# Altium PCB STN1170_RN-42_rev2.PcbDoc
Units mil, origin at the board's own origin, x right, y up, seen from the top; angles counter-clockwise.
Board outline 681.1 x 1476.38 mil, 2 copper layers (Top Layer, Bottom Layer), stack 63.4 mil thick; 40 components, 39 nets, 174 pads, 68 vias.
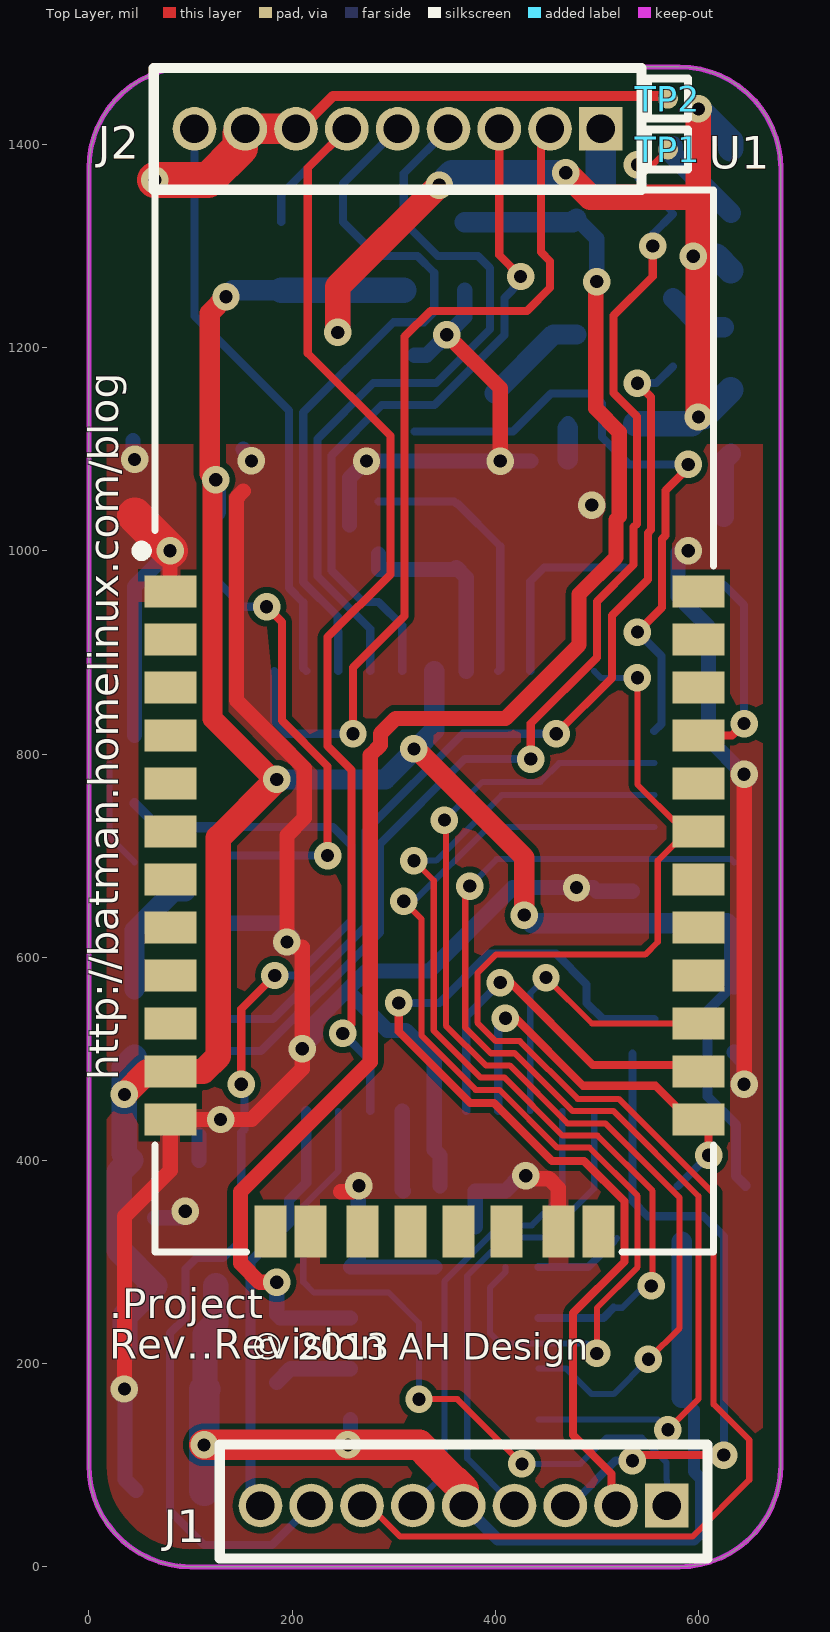
[diagram p0: Top Layer view]
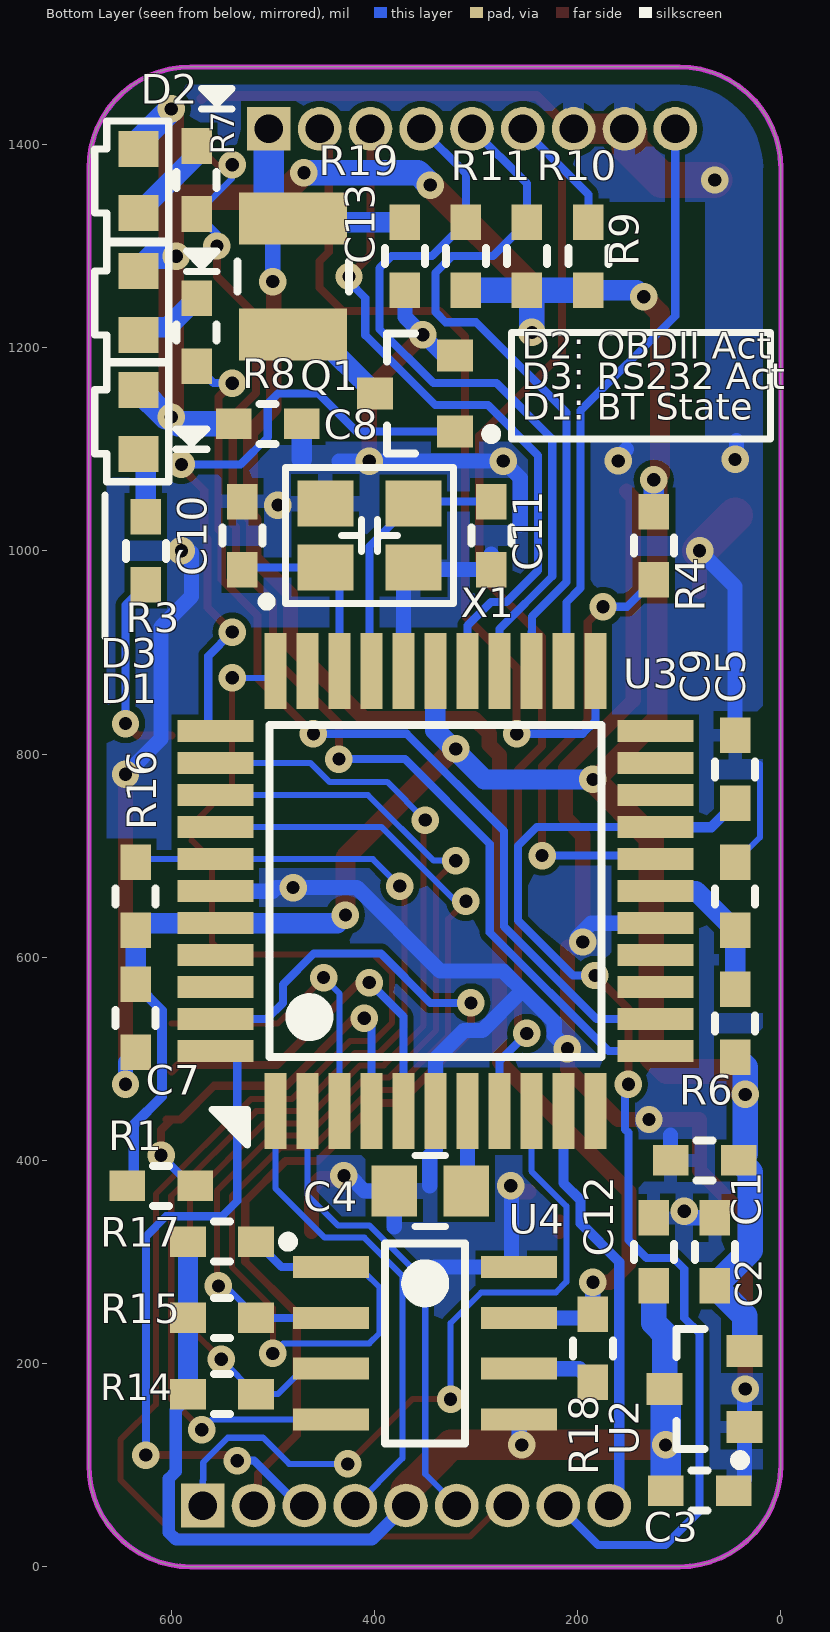
[diagram p1: Bottom Layer view, seen from below]

## Layer stack, top to bottom
Top Layer: signal copper 0.7
Dielectric: core 62, FR-408, Dk 3.81
Bottom Layer: signal copper 0.7

## Board outline
0,100 ccw(c100,100) 100,0 581.1,0 ccw(c581.1,100) 681.1,100 681.1,1376.38 ccw(c581.1,1376.38) 581.1,1476.38 100,1476.38 ccw(c100,1376.38) 0,1376.38

## Design rules (kind name [scope] priority, off if disabled: settings)
AcuteAngle [All] p1: minimum=6.00000000000000E+0001 checktracksonly=FALSE
Clearance Clearance_outline [OnLayer('Top Layer') or OnLayer('Bottom Layer') or IsVia vs OnLayer('Keep-Out Layer')] p1: gap=15
Clearance [All] p2: gap=6
ComponentClearance [All] p1: gap=6 collisioncheckmode=3 verticalgap=6 showdistances=FALSE
ComponentOrientations [All] p1: allowedrotations=27
DiffPairsRouting [All] p1: maxlimit=10 minlimit=5 mostfreqgap=7 maxuncoupledlength=250
FabricationTestPointUsage TestPointUsage [All] p1: valid=2 allowmultiple=TRUE
FabricationTestpoint Testpoint [All] p1: side=3 testpointundercomponent=FALSE minsize=40 maxsize=100 preferedsize=60 minholesize=0 maxholesize=40 preferedholesize=32 testpointgrid=1 allowsidetop=TRUE allowsidebottom=TRUE usegrid=TRUE gridtolerance=0.01
Height [All] p1: minheight=0 maxheight=1500 prefheight=500
HoleSize [All] p1: absolutevalues=TRUE maxlimit=500 minlimit=13 maxpercent=80.000 minpercent=20.000
MinimumAnnularRing [All] p1: minimumring=7
MinimumSolderMaskSliver MinimumSolderMaskSliver_J1_J2_U3 [InComponent('J1') or InComponent('J2') or InComponent('U3') or InComponent('U1')] p1: minsoldermaskwidth=4
MinimumSolderMaskSliver [All] p2: minsoldermaskwidth=4
PermittedLayers [All] p1: toplayerpermitted=TRUE bottomlayerpermitted=TRUE
PlaneConnect PlaneConnect_Vias [IsVia] p1: planeconnectstyle=Direct reliefexpansion=20 reliefentries=4 reliefconductorwidth=10 reliefairgap=10
PlaneConnect [All] p2: planeconnectstyle=Relief reliefexpansion=20 reliefentries=4 reliefconductorwidth=15 reliefairgap=15
PolygonConnect PolygonConnect_X1 [InComponent('X1')] p1: connectstyle=Relief reliefconductorwidth=15 reliefentries=4 polygonreliefangle="90 Angle"
PolygonConnect PolygonConnect_J1_J2 [InComponent('J1') or InComponent('J2')] p2: connectstyle=Relief reliefconductorwidth=20 reliefentries=4 polygonreliefangle="90 Angle"
PolygonConnect PolygonConnect_U1 [InComponent('U1')] p3: connectstyle=Relief reliefconductorwidth=20 reliefentries=4 polygonreliefangle="90 Angle"
PolygonConnect PolygonConnect_TQFP [HasFootprint( 'TQFP80P1200X1200X120-44N')] p4: connectstyle=Relief reliefconductorwidth=15 reliefentries=4 polygonreliefangle="90 Angle"
PolygonConnect PolygonConnect_SOIC [HasFootprint( 'SOIC8N') or HasFootprint('SOIC127P600X172-8L')] p5: connectstyle=Relief reliefconductorwidth=15 reliefentries=4 polygonreliefangle="90 Angle"
PolygonConnect PolygonConnect_1206 [HasFootprint( 'CC1206') or HasFootprint( 'R1206')] p6: connectstyle=Relief reliefconductorwidth=20 reliefentries=4 polygonreliefangle="90 Angle"
PolygonConnect PolygonConnect_0805 [HasFootprint( 'CC0805') or HasFootprint( 'R0805')] p7: connectstyle=Relief reliefconductorwidth=15 reliefentries=4 polygonreliefangle="90 Angle"
PolygonConnect PolygonConnect_SOD323 [HasFootprint( 'SOD323_1_2')] p8: connectstyle=Relief reliefconductorwidth=15 reliefentries=4 polygonreliefangle="90 Angle"
PolygonConnect PolygonConnect_0603 [HasFootprint( 'CC0603') or HasFootprint( 'R0603')] p9: connectstyle=Relief reliefconductorwidth=13 reliefentries=4 polygonreliefangle="90 Angle"
PolygonConnect PolygonConnect_TSSOP_0.65P [HasFootprint( 'TSSOP14') or HasFootprint( 'SOT-23-8L')] p10: connectstyle=Relief reliefconductorwidth=12 reliefentries=4 polygonreliefangle="90 Angle"
PolygonConnect PolygonConnect_SOT23 [HasFootprint( 'SOT23')] p11: connectstyle=Relief reliefconductorwidth=12 reliefentries=4 polygonreliefangle="90 Angle"
PolygonConnect PolygonConnect_SOT23-5L [HasFootprint( 'SOT-23-5')] p12: connectstyle=Relief reliefconductorwidth=15 reliefentries=4 polygonreliefangle="90 Angle"
PolygonConnect [All] p13: connectstyle=Direct reliefconductorwidth=10 reliefentries=4 polygonreliefangle="90 Angle"
RoomDefinition "U_STN1170_RN-42 SW_CAN" [InComponentClass('U_STN1170_RN-42 SW_CAN')] p1: confinementstyle=ConfineIn formatcopy=TRUE lockcomponents=FALSE outline 90,105 670,105 670,1365 90,1365
RoomDefinition "U_STN1170_RN-42 CPU" [InComponentClass('U_STN1170_RN-42 CPU')] p2: confinementstyle=ConfineIn formatcopy=TRUE lockcomponents=FALSE outline 10,135 685,135 685,1475 10,1475
RoomDefinition "STN1170_RN-42 Toplevel Rev2" [InComponentClass('STN1170_RN-42 Toplevel Rev2')] p3: confinementstyle=ConfineIn formatcopy=TRUE lockcomponents=FALSE outline -10,-15 685,-15 685,1490 -10,1490
RoutingTopology RoutingTopology_Bottom [OnLayer('Bottom Layer')] p1: topology=Vertical
RoutingTopology RoutingTopology_Mid4 [OnLayer('Mid-Layer 4')] p2: topology=Horizontal
RoutingTopology RoutingTopology_Mid3 [OnLayer('Mid-Layer 3')] p3: topology=Vertical
RoutingTopology RoutingTopology_Mid2 [OnLayer('Mid-Layer 2')] p4: topology=Horizontal
RoutingTopology RoutingTopology_Mid1 [OnLayer('Mid-Layer 1')] p5: topology=Vertical
RoutingTopology RoutingTopology_Top [OnLayer('Top Layer')] p6: topology=Horizontal
RoutingVias [All] p1: holewidth=20 width=36 viastyle="Through Hole" minholewidth=13 minwidth=27 maxholewidth=100 maxwidth=300
SilkToSilkClearance [IsText] p1: silktosilkclearance=0
SilkscreenOverComponentPads [IsText] p1: minsilkscreentomaskgap=3
SolderMaskExpansion SolderMaskExpansion_U3_U1 [InComponent('U3') or InComponent('U1')] p1: expansion=2
SolderMaskExpansion SolderMaskExpansion_J1_J2 [InComponent('J1') or InComponent('J2')] p2: expansion=1
SolderMaskExpansion SolderMaskExpansion_13mil_via [IsVia and AsMils(HoleSize = 13)] p3: expansion=-13.5
SolderMaskExpansion [All] p4: expansion=3
ViasUnderSMD [All] p1: allowed=FALSE
Width [All] p1: maxlimit=150 minlimit=6 preferedwidth=10 minimp=50.000000 maximp=50.000000 favimp=50.000000
17 further rules are at their usual default settings.

## Classes and differential pairs
component class "STN1170_RN-42 Toplevel Rev2": C1 C2 C3 D1 J1 J2 R1 R3 U1 U2
component class "U_STN1170_RN-42 CPU": C4 C5 C7 C8 C9 C10 C11 D2 D3 R4 R6 R7 R8 R9 R10 R11 R14 R15 TP1 TP2 U3 X1
component class "U_STN1170_RN-42 SW_CAN": C12 C13 Q1 R16 R17 R18 R19 U4

## Components (designator, comment, footprint, x,y, rotation, side; value= is the part's Value field where it differs from the comment)
C1 "0.1uF" CC0603 75,400 r0 bottom locked
C2 "1uF" CC0603 65,310 r270 bottom locked
C3 "0.1uF" CC0603 80,75 r180 bottom locked
C4 "10uF" CC0805 345,370 r0 bottom locked
C5 "0.1uF" CC0603 45,785 r270 bottom locked
C7 "0.1uF" CC0603 635,540 r90 bottom locked
C8 "0.1uF" CC0603 505,1125 r0 bottom locked
C9 "0.1uF" CC0603 45,660 r270 bottom locked
C10 "22pF" CC0603 530,1015 r270 bottom locked
C11 "22pF" CC0603 285,1015 r90 bottom locked
C12 "0.1uF" CC0603 125,310 r90 bottom locked
C13 "150pF" CC0603 370,1290 r90 bottom locked
D1 "APA1606SECK" KINGBRIGHT_APA1606SECK 632,1127 r270 bottom locked
D2 "APA1606SECK" KINGBRIGHT_APA1606SECK 632,1364.08 r270 bottom locked
D3 "APA1606SECK" KINGBRIGHT_APA1606SECK 632,1244.08 r270 bottom locked
J1 "TMS-109-02-L-S" Samtec_TMS-109-02-L-S 368.94,60.32 r180 top locked
J2 "TMS-109-02-L-S" Samtec_TMS-109-02-L-S 303.94,1415.31 r180 top locked
Q1 "2N7002K-7" SOT23 360,1155 r0 bottom locked
R1 "1K" R0603 610,375 r0 bottom
R3 "1K" R0603 625,1000 r270 bottom locked
R4 "10K" R0603 125,1005 r270 bottom locked
R6 "10" R0603 45,535 r90 bottom locked
R7 "1K" R0603 575,1365 r90 bottom locked
R8 "1K" R0603 575,1215 r90 bottom locked
R9 "10K" R0603 189.42,1290 r90 bottom locked
R10 "10K" R0603 250,1290 r90 bottom locked
R11 "10K" R0603 310,1290 r90 bottom locked
R14 "10K" R0603 550,170 r0 bottom locked
R15 "10K" R0603 550,245 r0 bottom locked
R16 "1K" R0603 635,660 r270 bottom locked
R17 "1K" R0603 550,320 r0 bottom locked
R18 "6.49K" R0603 185,215 r90 bottom locked
R19 "120" R1210 480,1270 r90 bottom locked
TP1 "Name" TP,0.5mmx0.5mm,RND 570,1395 r90 top locked
TP2 "Name" TP,0.5mmx0.5mm,RND 570,1445 r90 top locked
U1 "RN-42" RN-42 340,645 r0 top locked
U2 "MCP1700T-3302E/TT" SOT23 75,175 r0 bottom locked
U3 "STN1170 TQFP" TQFP80P1200X1200X120-44N 340,665 r90 bottom locked
U4 "TH8056KDC-AAA-008-RE" SOIC127P600X172-8L 350,220 r180 bottom locked
X1 "TSX-3225 16.0000MF18X-AC3" "Epson_TSX-3225 16.0000MF18X-AC3" 405,1015 r180 bottom locked

## Footprints (in the part's own frame and the unit in brackets; to place one, negate y for a bottom-side part, rotate by r counter-clockwise, add the part's x,y. Pads: shape width x height; smd on the part's side, far side on the other; paste and mask are expansions set on the pad)
CC0603 [mil] "Chip Capacitor, Body 1.6x0.8mm, IPC Medium Density"
  rect 35x30 smd: 1(-33.46,0) 2(33.46,0)
  silkscreen extent -8,-20 8,20, body extent -33,-19 33,19, height 24
CC0805 [mil] "Chip Capacitor, Body 2.0x1.3mm, IPC Medium Density"
  rect 45x50 smd: 1(-35.43,0) 2(35.43,0)
  silkscreen extent -15,-35 15,35, body extent -42,-28 42,28, height 26
"Epson_TSX-3225 16.0000MF18X-AC3" [mm] "Epson TSX-3225 series footprint"
  rect 1.4x1.15 smd: 1(-1.1,-0.8) 3(1.1,0.8) GND(-1.1,0.8) GND(1.1,-0.8)
  silkscreen extent -2.67,-1.75 2.1,1.7, body extent -1.58,-1.25 1.6,1.25, height 0.6
KINGBRIGHT_APA1606SECK [mm] "Kingbright Right-Angle LED footprint (0605)"
  rect 0.9x1 smd: A(-0.8,0) C(0.8,0)
  silkscreen extent -1.5,-1.1 1.5,0.75, body extent -0.8,-0.9 0.8,0.3, height 0.6
R0603 [mil] "Chip Resistor, 2-Leads, Body 1.7x0.8mm, IPC High Density"
  rect 35x30 smd: 1(-33.46,0) 2(33.46,0)
  silkscreen extent -8,-20 8,20, body extent -33,-19 33,19, height 24
R1210 [mm] "Chip Resistor, 2-Leads, Body 3.3x2.7mm, IPC High Density"
  rect 1.3x2.7 smd: 1(-1.45,0) 2(1.45,0)
  silkscreen extent -0.38,-1.4 0.38,1.4, body extent -1.68,-1.32 1.68,1.32, height 0.71
RN-42 [mm] "Roving Networks RN-42 module footprint"
  rect 1.3x0.8 smd: 1(-6.6,8)
  rect 1.3x0.8 smd paste-0.508: 2(-6.6,6.8) 3(-6.6,5.6) 4(-6.6,4.4) 5(-6.6,3.2) 6(-6.6,2) 7(-6.6,0.8) 8(-6.6,-0.4) 9(-6.6,-1.6) 10(-6.6,-2.8) 11(-6.6,-4) 12(-6.6,-5.2) 13(6.6,-5.2) 14(6.6,-4) 15(6.6,-2.8) 16(6.6,-1.6) 17(6.6,-0.4) 18(6.6,0.8) 19(6.6,2) 20(6.6,3.2) 21(6.6,4.4) 22(6.6,5.6) 23(6.6,6.8) 24(6.6,8)
  rect 0.8x1.3 smd paste-0.508: 28(3.1,-8) 29(-3.1,-8) 30(4.1,-8) 31(1.8,-8) 32(0.6,-8) 33(-0.6,-8) 34(-1.8,-8) 35(-4.1,-8)
  Top Layer pour cut-out: 6.75,11.75 6.75,17.75 -6.75,17.75 -6.75,11.75
  Bottom Layer pour cut-out: 6.75,11.75 6.75,17.75 -6.75,17.75 -6.75,11.75
  body extent -6.96,-8.36 6.96,17.6, height 2
Samtec_TMS-109-02-L-S [mil] "CONN HEADER .050\" 9POS PCB GOLD"
  rect 43x43 hole 28: 1(-200,0)
  round 43 hole 28: 2(-150,0) 3(-100,0) 4(-50,0) 5(0,0) 6(50,0) 7(100,0) 8(150,0) 9(200,0)
  silkscreen extent -240,-60 240,52
SOIC127P600X172-8L [mm] "SOIC, 8-Leads, Body 5.0x4.0mm (max), Pitch 1.27mm, IPC High Density"
  rect 1.9x0.55 smd: 1(-2.35,1.905) 2(-2.35,0.635) 3(-2.35,-0.635) 4(-2.35,-1.905) 5(2.35,-1.905) 6(2.35,-0.635) 7(2.35,0.635) 8(2.35,1.905)
  silkscreen extent -3.56,-2.5 1,2.66, body extent -1.99,-2.49 1.99,2.49, height 1.72
SOT23 [mm] "SOT23, 3-Leads, Body 3.0x2.6mm, Pitch 0.95mm"
  rect 0.9x0.8 smd: 1(-1,0.95) 2(-1,-0.95) 3(1,0)
  silkscreen extent -2.03,-1.5 0.7,1.5, body extent -0.7,-1.52 0.7,1.52, height 1.11
TP,0.5mmx0.5mm,RND [mm] "0.5x0.5 SMT test point."
  round 0.5 smd: 1(0,0)
  silkscreen extent -0.5,-0.5 0.5,0.5
TQFP80P1200X1200X120-44N [mm] "TQFP, 44-Leads, Body 12.0x12.0mm (max), Pitch 0.80mm, IPC Medium Density"
  rect 1.9x0.55 smd: 1(-5.5,4)
  rect 1.9x0.55 smd paste-0.381: 2(-5.5,3.2) 3(-5.5,2.4) 4(-5.5,1.6) 5(-5.5,0.8) 6(-5.5,0) 7(-5.5,-0.8) 8(-5.5,-1.6) 9(-5.5,-2.4) 10(-5.5,-3.2) 11(-5.5,-4) 23(5.5,-4) 24(5.5,-3.2) 25(5.5,-2.4) 26(5.5,-1.6) 27(5.5,-0.8) 28(5.5,0) 29(5.5,0.8) 30(5.5,1.6) 31(5.5,2.4) 32(5.5,3.2) 33(5.5,4)
  rect 0.55x1.9 smd paste-0.381: 12(-4,-5.5) 13(-3.2,-5.5) 14(-2.4,-5.5) 15(-1.6,-5.5) 16(-0.8,-5.5) 17(0,-5.5) 18(0.8,-5.5) 19(1.6,-5.5) 20(2.4,-5.5) 21(3.2,-5.5) 22(4,-5.5) 34(4,5.5) 35(3.2,5.5) 36(2.4,5.5) 37(1.6,5.5) 38(0.8,5.5) 39(0,5.5) 40(-0.8,5.5) 41(-1.6,5.5) 42(-2.4,5.5) 43(-3.2,5.5) 44(-4,5.5)
  silkscreen extent -4.15,-4.15 4.15,4.15, body extent -5,-5 5,5, height 1.2

## Part data
C1 C3 C5 C7 C8 C9 C12: library part 0.1uF,50V,CC0603,X7R,+/-20%, "0.1uF 50V, in a CC0603, X7R ,+/-20%,LF"
C2: library part 1uF,6.3V,CC0603,X7R,+/-20%, "1uF 6.3V, in a CC0603, X7R ,+/-20%,LF"
C4: library part 10uF,6.3V,CC0805,X5R,+/-20%, "10uF 6.3V, in a CC0805, X5R ,+/-20%,LF"
C10 C11: library part 22pF,10V,CC0603,COG,+/-2%, "22pF 10V, in a CC0603, COG ,+/-2%,LF"
C13: library part 150pF,50V,CC0603,X7R,+/-20%, "150pF 50V, in a CC0603, X7R ,+/-20%,LF"
D1 D2 D3: library part KINGBRIGHT_APA1606SECK, "LED 1.6X0.6MM 601NM Orange Right-Angle SMD"
J1 J2: library part Samtec_TMS-109-02-L-S, "9 pin through hole micro header, 50mil pitch"
Q1: "N-Channel MOSFET, 60V, 0.300A, 2ohms, SOT23"
R1 R3 R7 R8 R16 R17: library part 1K,R0603,5%, "1K, Gen Purp Chip, R0603 0.1W 5%"
R4 R9 R10 R11 R14 R15: library part 10K,R0603,5%, "10K, Gen Purp Chip, R0603 0.1W 5%"
R6: library part 10,R0603,5%, "10, Gen Purp Chip, R0603 0.1W 5%"
R18: library part 6.49K,R0603,1%, "6.49K, Gen Purp Chip, R0603 0.1W 1%"
R19: library part 120,R1210,5%, "120, Gen Purp Chip, R1210 0.5W 5%"
TP1 TP2: library part "TP, 0.5mm x 0.5mm SMT, RND", "0.5mm diameter testpoint"
U1: "Roving Networks Bluetooth Serial Module"
U2: "IC LDO REG 250MA 3.3V SOT-23-3"
U3: library part STN1170_TQFP, "Multiprotocol OBD to UART Interpreter with Medium-Speed CAN and Single-Wire CAN support"
U4: "Single-wire CAN transceiver"
X1: "CRYSTAL 16.0000MHZ 9PF SMD"

## Via types
v1: diameter 27, hole 13, Top Layer to Bottom Layer, tented both sides, 68 vias

## Nets (pads, with @x,y where several pads share a name; then routed paths per layer and width w, separated by ;. In a path a pad name is that pad's centre, name@x,y a point inside that pad or via, vN(x,y) a via of type N, cw(c..) or ccw(c..) an arc to the next point about the centre after c; other vN are vias at no path point)
+3.3V: C1.1 C2.2 C7.2 C8.2 D1.A D2.A D3.A R1.2 R4.1 R6.1 R9.1 R10.1 R11.1 R16.2 U1.11 U2.2 U3.28 U3.40 | length 3408
  Top Layer w20: v1(135,1250) 119,1234 119,1076 v1(125,1070) 121.75,1066.75 121.75,834.72 181.46,775 v1(185,775) ; v1(320,805) 321.72,805 428.5,698.22 v1(428.5,641.5)
  Top Layer w25: v1(35,465) 57.52,487.52 U1.11 112.52,487.52 127.5,502.5 127.5,717.5 v1(185,775) ; v1(245,1215) 245,1260 v1(345,1360) ; v1(469.44,1372.18) 493.61,1348 597,1348 600,1345 ; v1(595,1290) v1@600,1295 ; v1(600,1131.72) v1@600,1295 ; v1(600,1435) 600,1345 ; v1@600,1295 600,1345
  Bottom Layer w10: C7.2 609,547.46 609,462.93 636.93,435 636.93,384.54 R1.2@646.46,375
  Bottom Layer w20: R4.1 v1(125,1070) ; v1(135,1250) 141.54,1256.54 R9.1 ; v1@181.87,775 v1(185,775) 292,775 v1@320,803 ; v1(320,805) v1@320,803 ; U3.28 340,823.28 323.5,806.78 323.5,806.5 v1@320,803 ; v1(428.5,641.5) 436.5,633.5 U3.40 628.03,633.5 R16.2 C7.2
  Bottom Layer w25: U2.2 35.63,247.17 C2.2 30,311.54 30,388.46 C1.1 35,406.54 v1(35,465) 35,491.54 R6.1 ; R9.1 R10.1 ; v1(245,1215) 245,1251.54 R10.1 ; R11.1 R10.1 ; v1(345,1360) 357.18,1372.18 v1(469.44,1372.18) ; C8.2 593.28,1125 v1(600,1131.72) 605.22,1131.72 D1.A ; v1(595,1290) 617.57,1290 D3.A ; v1(600,1435) 632,1403 D2.A
+3.3V_ANALOG: C9.2 R6.2 U3.17 | length 124
  Bottom Layer w20: R6.2 C9.2 83.46,665 U3.17@95,665
+5V: C3.1 C12.1 J1.5 R14.2 R15.2 R17.2 U2.3 U4.5 | length 1071.5
  Top Layer w15: v1(255,120) v1@255,125
  Top Layer w30: v1(113.46,120) v1(255,120) 325,120 333.5,111.5 333.5,110.74 360.74,83.5 361.5,83.5 368.94,76.06 J1.5
  Bottom Layer w12: J1.5 402.44,26.82 595.41,26.82 602.44,33.84 602.44,86.79 595.5,93.72 595.5,154.5 R14.2@583.46,166.54
  Bottom Layer w15: v1(255,120) 257.48,122.48 U4.5
  Bottom Layer w20: R14.2@583.46,166.54 R15.2 R17.2
  Bottom Layer w25: U2.3 114.37,229.37 125,240 C12.1
  Bottom Layer w30: C3.1 v1(113.46,120) 113.46,174.09 U2.3
ANALOG_IN: C5.2 J1.8 U3.19 | length 1159.1
  Top Layer w8: v1(150,475) 150,549 v1(183,582)
  Bottom Layer w8: U3.19 240.24,727.99 258.5,709.73 258.5,636.03 204.47,582 v1(183,582) ; v1(150,475) 153.22,471.78 153.22,430.54 150,427.32 150,321.82 132.21,304.04 105.86,304.04 95,293.18 95,245 80,230 80,55 113.5,21.5 180.12,21.5 J1.8
  Bottom Layer w10: C5.2 68.54,727.99 U3.19
CAN_LOAD: R18.1 U4.6 | length 78.1
  Bottom Layer w15: R18.1 198.46,195 U4.6
CONNECT: R3.2 U1.21 | length 194.9
  Top Layer w8: U1.21 633.23,818.23 v1(645,830)
  Bottom Layer w8: R3.2 645,946.54 v1(645,830)
GND: C1.2 C2.1 C3.2 C4.2 C5.1 C7.1 C8.1 C9.1 C10.1 C11.1 C12.2 C13.1 J2.7 J2.8 Q1.2 TP2.1 U1.1 U1.12 U1.28 U1.29 U2.1 U3.6 U3.16 U3.29 U3.39 U4.8 X1.GND | length 4602.6
  Top Layer w10: J2.7 207.98,1415.31 240.48,1447.81 567.19,1447.81 TP2.1
  Top Layer w15: v1(35,175) 35,345 80.16,390.16 U1.12 v1(129.72,440.28) 160.28,440.28 210,490 v1(210,510) 210,610 200,610 v1(195,615) 195,720 212,737 212,786.18 145.25,852.94 145.25,1052.06 152,1058.82 ; v1(80,1000) 80,960.12 U1.1 ; U1.29 U1.29@217.95,339.29 ; 247.79,369.13 259.8,369.13 v1(265.8,375.13) ; v1(352.37,1212.63) 405,1160 v1(405,1088.35) ; v1(430,385) 432.98,382.02 452.98,382.02 462.05,372.95 U1.28 ; v1(645,475) v1(645,780)
  Top Layer w30: J2.8 J2.7
  Top Layer w35: 45,1035 v1(80,1000) ; v1(65,1365) 117.26,1365 148.94,1396.68 148.94,1410.31 J2.8
  Bottom Layer w6: 20.5,790 20.5,717.96 C9.1
  Bottom Layer w15: v1(35,175) 35.63,174.37 U2.1 35.63,85.91 C3.2 ; 43.5,1108.5 43.5,1091.5 v1(45,1090) ; C5.1 45,965 v1(80,1000) ; C2.1 v1@91.93,343.46 ; v1(95,350) v1@95,355 ; C1.2 108.46,425 ; U3.16 186.5,633.5 200,620 200,610 v1(195,615) ; 152,1100 160,1092 v1(160,1088.5) ; v1(210,510) 223,523 223,536.18 251.82,565 ; 256.5,1025.37 256.5,1071.56 v1(273.29,1088.35) v1(405,1088.35) 434.89,1088.35 ; v1(265.8,375.13) 265.13,375.13 265.13,302.65 U4.8 340.7,295 ; C11.1@285,996.87 C11.1 359.72,981.54 361.69,983.5 371.5,973.7 U3.29 ; Q1.2 332.15,1192.4 v1(352.37,1212.63) 370,1230.25 C13.1 ; 345.57,375 345.57,404.87 340,410.43 U3.6 340,500 312,528 293.82,528 256.82,565 251.82,565 ; 380.43,334.74 C4.2 410,370 425,385 v1(430,385) ; C8.1@471.54,1120.54 C8.1 ; U3.39@535,665 500,665 496.5,668.5 v1(480,668.5) 417.32,668.5 335.32,586.5 273.32,586.5 251.82,565 ; v1@590,995 v1(590,1000) 580,998.46 580,955 610,925 610,815 v1(645,780) ; C7.1 645,496.54 v1(645,475)
  Bottom Layer w20: 471.54,1090 C8.1@471.54,1120.54
  other v1: 495,1045
HS_CAN_RX: J1.6 U3.2 | length 467.2
  Bottom Layer w6: J1.6 350,91.38 350,280.97 405.03,336 436,336 465.98,365.98 U3.2
HS_CAN_TX: J1.4 U3.1 | length 482
  Bottom Layer w6: J1.4 372.5,106.75 372.5,286.5 410,324 449,324 497.48,372.48 U3.1
ISO_K_TX#: J1.1 U3.9 | length 721.2
  Top Layer w6: v1(325,165) 362.58,165 v1(426.27,101.31)
  Bottom Layer w6: U3.9 245.51,389.49 211.08,355.06 211.08,280.45 221.52,270 295,270 325,240 v1(325,165) ; v1(426.27,101.31) 483.81,101.31 509.5,127 544.32,127 568.46,102.86 568.46,85.47 568.94,85 J1.1
ISO_L_TX#: J1.9 U3.10 | length 415.1
  Bottom Layer w10: J1.9 159,70.25 159,300 197.08,338.08 197.08,360.85 214.02,377.79 U3.10
ISO_RX#: J2.6 R9.2 U3.8 | length 1185.4
  Top Layer w8: v1(250,525) 249.59,525.41 258.5,534.32 258.5,784.23 235,807.73 235,915 296.79,976.79 296.79,1113.21 215.52,1194.48 215.52,1376.89 J2.6
  Bottom Layer w8: R9.2 189.42,1350.8 J2.6 ; v1(250,525) 277.01,497.99 U3.8
J1850_BUS+_TX: J2.2 U3.23 | length 871.1
  Top Layer w8: v1(260,820) 260,885 310.79,935.79 310.79,1210.79 336.13,1236.13 431.13,1236.13 453.94,1258.94 453.94,1285 445,1293.94 445,1406.38 J2.2
  Bottom Layer w8: U3.23 182.52,832.48 195,820 v1@255.97,820 ; v1@255.48,820.48 v1@255.97,820 ; v1(260,820) v1@255.97,820
J1850_BUS-_TX#: J2.9 U3.24 | length 579.4
  Bottom Layer w8: J2.9 103.94,1231.06 197,1138 197,963.4 211,949.4 211,884.55 U3.24
MS_CAN_RX: J1.3 U3.44 | length 641.2
  Top Layer w8: v1(535,104.5) 540.5,110 v1(625,110)
  Bottom Layer w8: J1.3 474.39,60.32 518.57,104.5 v1(535,104.5) ; U3.44@535,505 535,360 550,345 605.11,345 625,325.11 v1(625,110)
MS_CAN_TX: J1.2 U3.43 | length 960.4
  Top Layer w8: v1(305,555) 305,526.91 375.41,456.5 398.85,456.5 455.83,399.52 487.42,399.52 527.17,359.77 527.17,300.31 476.5,249.64 476.5,129.77 514.63,91.64 J1.2@514.63,64.63
  Bottom Layer w8: v1(305,555) 345,555 393.5,603.5 459.73,603.5 490,573.23 490,555 505.98,539.02 U3.43
NetC4_1: C4.1 U3.7 | length 78.9
  Bottom Layer w15: U3.7 308.5,371.06 C4.1
NetD1_C: D1.C R3.1 | length 64.9
  Bottom Layer w20: R3.1 625,1088.5 D1.C
NetD2_C: D2.C R7.2 | length 89.5
  Bottom Layer w20: R7.2 575,1389.58 D2.C
NetD3_C: D3.C R8.2 | length 61.8
  Bottom Layer w20: R8.2 603.46,1220 D3.C@625,1220
NetQ1_3: Q1.3 R19.1 | length 104.6
  Bottom Layer w20: Q1.3 457.28,1212.91 R19.1
OBD_LED#: R7.1 TP1.1 U3.12 | length 1194.4
  Top Layer w6: v1(540,1380) 555,1380 TP1.1
  Top Layer w8: v1(435,795) 435,830 500,895 500,950 536.25,986.25 536.25,1023.32 539.5,1026.57 539.5,1132.27 516.5,1155.27 516.5,1231.5 555,1270 v1(555,1300)
  Bottom Layer w6: v1(540,1380) 540,1366.54 R7.1
  Bottom Layer w8: U3.12 169.59,507.52 286.5,624.43 286.5,711.5 370,795 v1(435,795) ; v1(555,1300) 555,1311.54 R7.1
OSC1: C11.2 U3.30 X1.3 | length 262
  Bottom Layer w8: C11.2 359.72,1048.46 X1.3 363.04,1046.5 405,1004.54 405,883.54 U3.30
OSC2: C10.2 U3.31 X1.1 | length 190.2
  Bottom Layer w8: U3.31 434.49,969.69 X1.1 528.03,983.5 C10.2
PWM/VPW#: J2.3 U3.27 | length 687.6
  Top Layer w8: J2.3 403.94,1291.06 v1(425,1270)
  Bottom Layer w8: U3.27 308.5,926.5 285.2,949.8 270,949.8 239,980.8 239,1094 288.35,1143.35 340.11,1143.35 409,1212.24 409,1249 425,1265 v1(425,1270)
PWM_RX: J2.5 R10.2 U3.25 | length 702.3
  Bottom Layer w8: U3.25 245.51,920 245,920.51 245,935.2 211,969.2 211,1136 300,1225 330,1225 340,1235 340,1273.67 323.67,1290 283.47,1290 R10.2 250,1361.38 J2.5
RESET#: R4.2 U3.18 | length 443.8
  Top Layer w8: v1(175,945) 190,930 190,832.93 235,787.93 v1(235,700)
  Bottom Layer w8: U3.18 126.97,700 v1(235,700) ; R4.2 151.54,945 v1(175,945)
RS232_LED#: R8.1 U3.13 | length 939.2
  Top Layer w8: v1(460,820) 515,875 515,936.46 550.25,971.71 550.25,1017.52 553.5,1020.77 553.5,1151.5 v1(540,1165)
  Bottom Layer w8: U3.13 181.28,539.02 272.5,630.23 272.5,724.27 368.23,820 v1(460,820) ; v1(540,1165) 558.46,1165 R8.1
SHUTDOWN#: J1.7 U1.19 U3.33 | length 1569
  Top Layer w6: J1.7 275.8,60.32 306.3,29.82 594.16,29.82 650,85.65 650,125 615,160 615,366.97 521.45,460.52 481.1,460.52 424.12,517.5 400.68,517.5 382.5,535.68 382.5,584.32 400.68,602.5 547.5,602.5 560,615 560,695 U1.19@580,715 ; v1(540,875) 540,770 U1.19@580,730
  Bottom Layer w6: U3.33 504.02,875 v1(540,875)
SW_CAN_HS_MODE: Q1.1 U3.34 | length 633.4
  Top Layer w8: v1(540,920) 564.25,944.25 564.25,1011.72 567.5,1014.97 567.5,1059.5 593,1085 v1(590,1085)
  Bottom Layer w8: Q1.1 417.6,1117.6 444.04,1144.04 444.04,1144.14 454.89,1155 495,1155 505,1145 505,1111.82 531.82,1085 v1(590,1085) ; v1(540,920) 563.5,896.5 563.5,829.44 U3.34
SW_CAN_MODE0: R15.1 U3.36 U4.2 | length 936.4
  Top Layer w6: v1@325,690 339.5,675.5 339.5,527.77 385.77,481.5 409.2,481.5 466.18,424.52 500.48,424.52 555,370 555,275 v1(553.53,276.47)
  Bottom Layer w6: v1(320,695) 341.82,695 406.31,759.49 U3.36 ; R15.1@516.54,255 525,255 550,280 v1(553.53,276.47)
  Bottom Layer w8: U4.2 506.54,245 R15.1@516.54,255
SW_CAN_MODE1: R14.1 U3.35 U4.3 | length 1037.5
  Top Layer w6: v1(350,735) 351.5,733.5 351.5,532.74 390.74,493.5 414.17,493.5 471.15,436.52 508.48,436.52 581.54,363.46 581.54,235 v1(550.77,204.23)
  Bottom Layer w6: v1(350,735) 387.5,772.5 444.32,772.5 462.8,790.98 U3.35 ; U4.3 470,195 495,170 R14.1 v1(550.77,204.23)
SW_CAN_RX: R16.1 U3.38 U4.4 | length 1085.6
  Top Layer w6: v1(375,670) 370.5,665.5 370.5,530.71 395.71,505.5 419.14,505.5 476.13,448.52 516.48,448.52 600,365 600,165 v1(570,135)
  Bottom Layer w6: v1(375,670) 401.5,696.5 U3.38 631.97,696.5 R16.1 ; U4.4 560,145 v1(570,135)
SW_CAN_TX: R17.1 U3.37 U4.1 | length 1139.7
  Top Layer w6: v1(310,655) 327.5,637.5 327.5,522.8 380.8,469.5 404.23,469.5 461.21,412.52 492.8,412.52 540.17,365.16 540.17,294.92 500,254.76 v1(500,210)
  Bottom Layer w6: v1(310,655) 320,655 392.99,727.99 U3.37 ; U4.1@410,295 410,290 395,275 395,230 405,220 490,220 v1(500,210) ; R17.1 R17.1@520,323.46
  Bottom Layer w8: U4.1 491.54,295 R17.1
SW_CANH: C13.2 J2.1 R18.2 R19.2 U4.7 | length 1588.8
  Top Layer w15: v1(185,280) 168.19,280 149.33,298.86 149.33,369.13 277,496.8 277,798.82 287,808.82 287,820 302,835 410,835 482.5,907.5 482.5,957.25 518.75,993.5 518.75,1030.57 522,1033.82 522,1117 499,1140 499,1264 v1(500,1265)
  Bottom Layer w15: v1(185,280) R18.2 188.46,245 U4.7 ; R19.2 500,1307.09 v1(500,1265)
  Bottom Layer w20: C13.2 476.38,1323.47 R19.2
  Bottom Layer w30: R19.2@503.94,1351.02 J2.1
UART_CTS: U1.15 U3.3 | length 306.5
  Top Layer w6: v1(450,580) 495.24,534.76 U1.15
  Bottom Layer w6: U3.3 434.49,564.49 v1(450,580)
UART_RX: U1.14 U3.5 | length 371.5
  Top Layer w8: v1(405,575) 415,575 496.02,493.98 593.38,493.98 U1.14
  Bottom Layer w8: U3.5 371.5,541.5 v1(405,575)
UART_TX: R1.1 U1.13 U3.4 | length 412.8
  Top Layer w8: v1(410,540) 420,540 486.48,473.52 557.75,473.52 590.99,440.28 U1.13 ; U1.13@604.72,440.28 U1.13 ; v1(610,405) 610,430.12 U1.13
  Bottom Layer w8: U3.4 402.99,532.99 v1(410,540) ; R1.1@579.54,375 580,375 v1(610,405)
VPW_RX: J2.4 R11.2 U3.26 | length 738.7
  Bottom Layer w8: U3.26 277.01,922.99 225,975 225,1110 280,1165 341.96,1165 395,1218.04 395,1278.18 383.18,1290 343.47,1290 R11.2 310,1371.38 J2.4
pads on no net: U1.2 U1.3 U1.4 U1.5 U1.6 U1.7 U1.8 U1.9 U1.10 U1.16 U1.17 U1.18 U1.20 U1.22 U1.23 U1.24 U1.30 U1.31 U1.32 U1.33 U1.34 U1.35 U3.11 U3.14 U3.15 U3.20 U3.21 U3.22 U3.32 U3.41 U3.42

## Polygon pours and split planes (outlines as drawn)
GND on Top Layer "GND1" (solid, remove dead copper, pour order 7): 0,0 0,1476.38 205,1476.38 681.1,1476.38 681.1,1355 681.1,0 0,0
GND on Bottom Layer "GND2" (solid, remove dead copper, pour order 6): 0,0 0,1476.38 205,1476.38 681.1,1476.38 681.1,1355 681.1,0 0,0

## Keep-outs
Keep-Out Layer:
  the board outline again, w5

## Other copper
Top Layer:
  pour cut-out: 681,1105 681,1476 0,1476 0,1105
  pour cut-out: 270,835 285,835 285,825 270,825

## Silkscreen, mask and mechanical layers (free items; w line width, h text height)
Top Overlay:
  circle w10: c52,1000 r5
  lines w7: 65,415 65,310 155,310 ; 65,1020 65,1355 80,1355 ; 525,310 615,310 615,415 ; 543.94,1355.31 615,1355.31 615,985
  lines w10: 573.94,8.32 608.94,8.32 608.94,33.32
  text "http://batman.homelinux.com/blog" at 39,479 h50 r90
  text ".Project" at 20,235 h50
  text "Rev." at 20,195 h50
  text ".Revision" at 110,195 h50
  text "© 2013" at 158,195 h45
  text "AH Design" at 305,195 h45
Bottom Overlay:
  region: 560,450 525,415 525,450
  region: 585,1295 570,1280 555,1295
  region: 595,1120 580,1105 565,1120
  region: 570,1455 555,1440 540,1455
  lines w7: 540,1435 570,1435 ; 555,1275 585,1275 ; 565,1100 595,1100 ; 665,915 665,1055 ; 10,1110 10,1215 265,1215 265,1110 10,1110 ; 525,415 560,450 525,450 525,415 ; 540,1455 555,1440 570,1455 560,1455 540,1455 ; 555,1295 575,1295 585,1295 570,1280 555,1295 ; 565,1120 580,1105 595,1120 585,1120 565,1120
  text "D2: OBDII Act" at 255,1180 h45
  text "D3: RS232 Act" at 255,1150 h45
  text "D1: BT State" at 255,1120 h45
Assy Dwg Bot:
  circle w10: c60,130 r5
  region: 650,1085 635,1070 620,1085
  region: 650,1200 635,1185 620,1200
  region: 650,1320 635,1305 620,1320
  lines w7: 620,1065 650,1065 ; 620,1180 650,1180 ; 620,1300 650,1300 ; 620,1085 640,1085 650,1085 635,1070 620,1085 ; 620,1200 635,1185 650,1200 640,1200 620,1200 ; 620,1320 635,1305 650,1320 640,1320 620,1320
  text "U3" at 400,620 h157.48
  text "U4" at 385,200 h75
Mechanical 18:
  the board outline again, w5

## Dimensions
581.1,1476.38 to 581.1,0 on Dimensions
0,100 to 681.1,100 on Dimensions